# Altium PCB XPIRL_0V0.PCBDOC (part 4 of 4)
Units mil, origin at the board's own origin, x right, y up, seen from the top; angles counter-clockwise.
Board outline 3497.26 x 1372.5 mil, 6 copper layers (Top Layer, Mid-Layer 1, Mid-Layer 2, Mid-Layer 3, Mid-Layer 4, Bottom Layer); 217 components, 126 nets, 782 pads, 361 vias.
Unrouted connection lines stored in the file: 96.
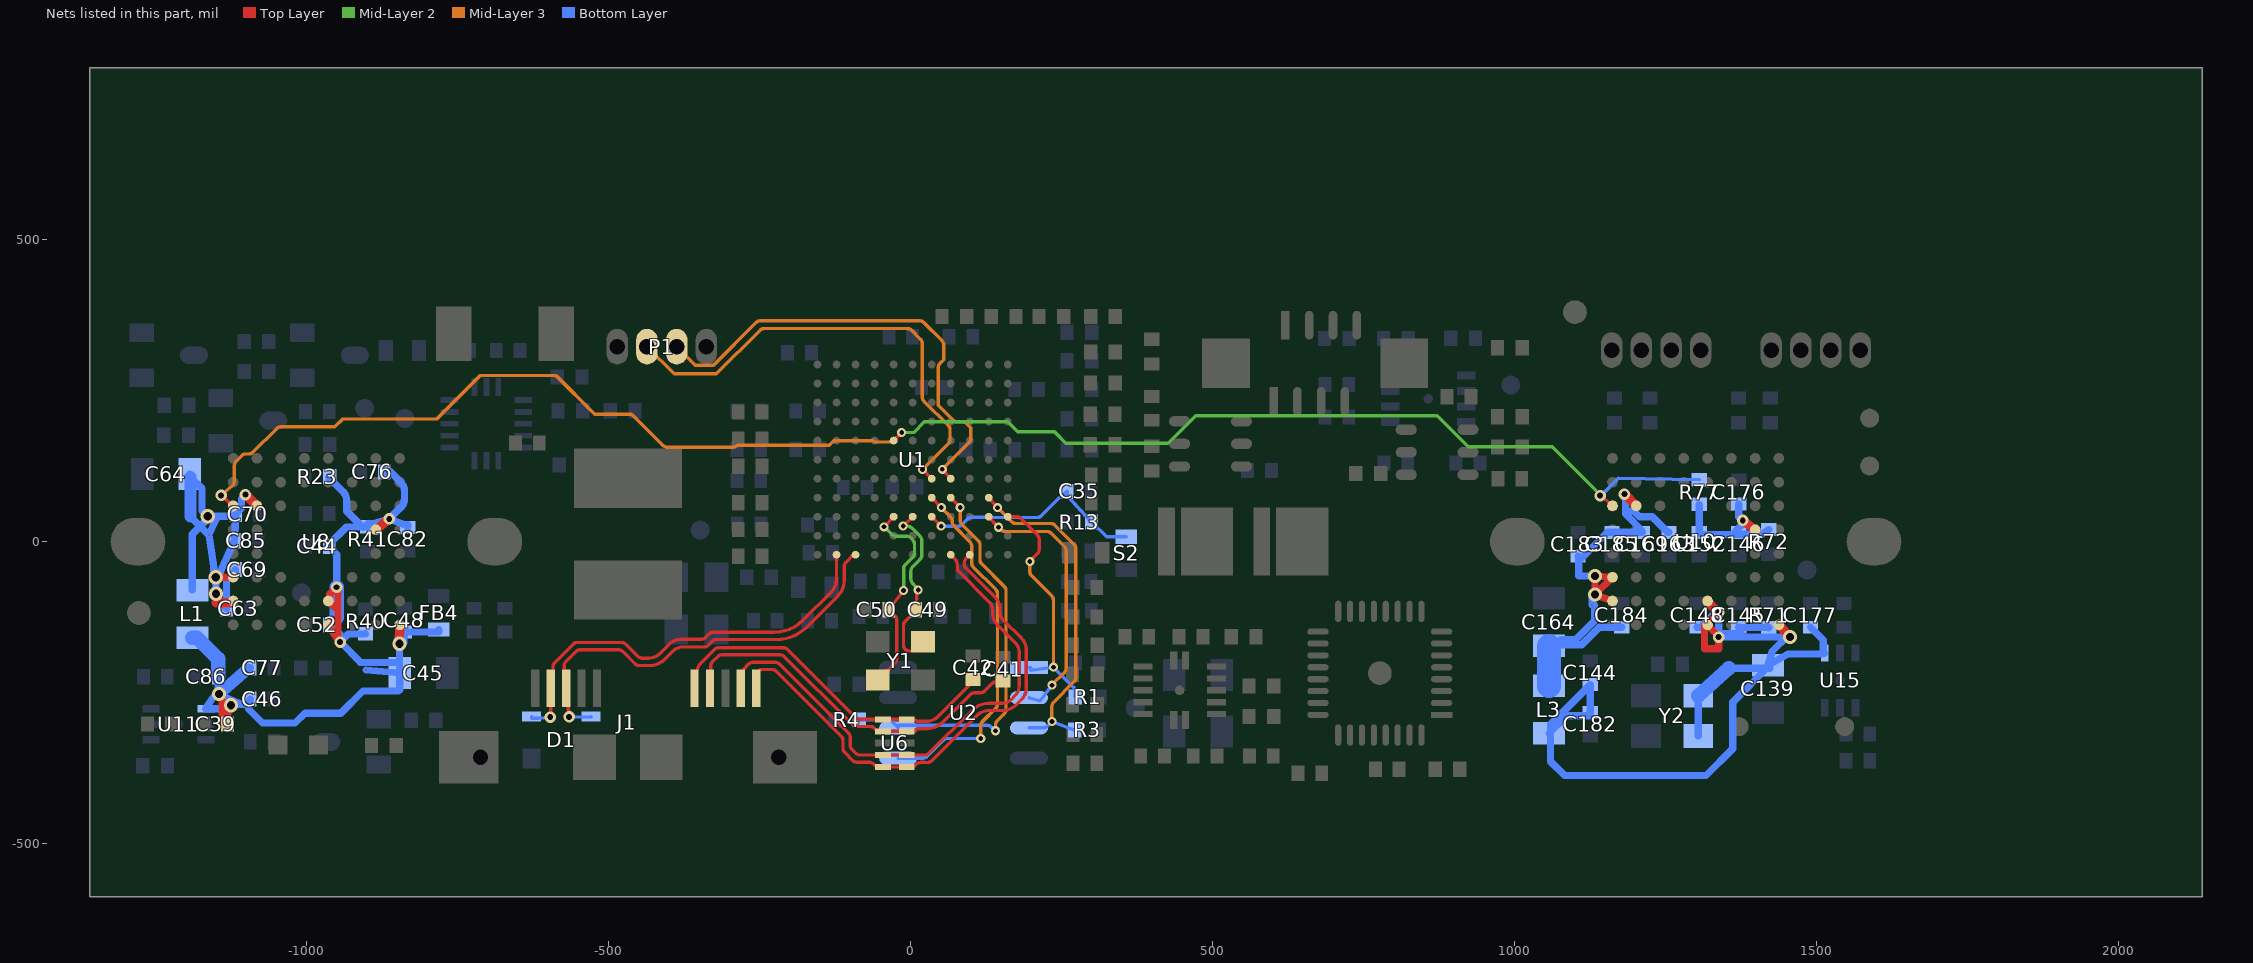
[diagram p8: the nets of this part, all layers, seen from the top]

## Via types
v1: diameter 19, hole 9.84, Top Layer to Bottom Layer, 139 vias
v2: diameter 15, hole 7.87, Top Layer to Bottom Layer, 113 vias
v3: diameter 20.47, hole 11.81, Top Layer to Bottom Layer, 58 vias
v4: diameter 23.62, hole 13.78, Top Layer to Bottom Layer, 42 vias
v5: diameter 0, hole 0, Top Layer to Bottom Layer, 9 vias

## Nets (pads, with @x,y where several pads share a name; then routed paths per layer and width w, separated by ;. In a path a pad name is that pad's centre, name@x,y a point inside that pad or via, vN(x,y) a via of type N, cw(c..) or ccw(c..) an arc to the next point about the centre after c; other vN are vias at no path point) (continued)
ROM_WPN: R3.2 U1.D2 U2.3 | length 603.8
  Top Layer w5.6: U1.D2@128.86,72.7 v2(143.47,56.19)
  Mid-Layer 3 w5.6: v2(143.47,56.19) 166.83,32.83 ; v2(233.41,-298.02) 233.41,-272.91 ; 166.83,32.83 ccw(c173.76,39.76) 173.76,29.96 ; 166.83,32.83 ccw(c173.76,39.76) 173.76,29.96 ; 173.76,29.96 231.57,29.96 ; 231.57,29.96 cw(c231.57,20.16) 238.5,27.09 ; 231.57,29.96 cw(c231.57,20.16) 238.5,27.09 ; 233.41,-272.91 cw(c243.21,-272.91) 236.28,-265.98 ; 233.41,-272.91 cw(c243.21,-272.91) 236.28,-265.98 ; 236.28,-265.98 269.95,-232.3 ; 238.5,27.09 269.95,-4.37 ; 269.95,-232.3 ccw(c263.02,-225.38) 272.82,-225.38 ; 269.95,-232.3 ccw(c263.02,-225.38) 272.82,-225.38 ; 269.95,-4.37 cw(c263.02,-11.3) 272.82,-11.3 ; 269.95,-4.37 cw(c263.02,-11.3) 272.82,-11.3 ; 272.82,-225.38 272.82,-11.3
  Bottom Layer w5.6: U2.3@195.41,-308.46 218.9,-308.46 ccw(c218.9,-298.66) 225.83,-305.59 v2(233.41,-298.02) 270.84,-312.23 R3.2@271.32,-311.75
RSTN: C35.2 R13.2 S2.1 U1.C5 | length 387.2
  Top Layer w5.6: U1.C5@34.37,41.2 v2(50.12,25.45)
  Bottom Layer w5.6: v2(50.12,25.45) 77.81,25.45 ccw(c77.81,35.25) 84.74,28.32 93.9,37.49 cw(c100.83,30.56) 100.83,40.36 127.63,40.36 128.04,39.95 209.19,39.95 ccw(c209.19,49.75) 216.12,42.82 247.19,73.89 247.26,73.89 C35.2@258.75,83.11 259.11,75.71 R13.2@298.9,32.32 299.53,32.32 323.88,7.97 S2.1@356.5,7.97
SPI_MISO: U1.C2 U2.2 | length 437.2
  Top Layer w5.6: U1.C2@128.86,41.2 144.27,23.62 v2(144.99,23.71)
  Mid-Layer 3 w5.6: v2(144.99,23.71) 149.07,19.63 ccw(c156,26.56) 156,16.76 225.16,16.76 cw(c225.16,6.96) 232.09,13.89 254.45,-8.47 cw(c247.52,-15.4) 257.32,-15.4 257.32,-209.02 cw(c247.52,-209.02) 254.45,-215.95 233.41,-236.99 v2(233.41,-237.72)
  Bottom Layer w5.6: U2.2@195.41,-258.46 213.45,-263.78 214.93,-262.3 ccw(c207.99,-255.37) 215.01,-262.22 v2(233.41,-237.72)
SPI_MOSI: U1.D5 U2.5 | length 601.5
  Top Layer w5.6: U1.D5@34.37,72.7 v2(50.38,56.26)
  Mid-Layer 3 w5.6: v2(50.38,56.26) 65.55,41.09 cw(c58.62,34.16) 68.42,34.16 68.42,32.9 ccw(c78.22,32.9) 71.29,25.97 97.67,-0.41 cw(c90.74,-7.34) 100.54,-7.34 100.54,-35.3 ccw(c110.34,-35.3) 103.41,-42.23 140.42,-79.24 cw(c133.49,-86.17) 143.29,-86.17 143.29,-268.99 cw(c133.49,-268.99) 140.42,-275.91 118.48,-297.86 ccw(c125.4,-304.79) 115.6,-304.79 v2(115.6,-325.96)
  Bottom Layer w5.6: U2.5@-21.13,-358.46 20.19,-358.46 ccw(c20.19,-348.66) 27.12,-355.59 53.89,-328.83 cw(c60.82,-335.76) 60.82,-325.96 v2(115.6,-325.96)
SPI_SCK: R4.2 U1.D4 U2.6 | length 667.2
  Top Layer w5.6: U1.D4@65.87,72.7 81.62,56.7 v2(81.58,56.43)
  Mid-Layer 3 w5.6: v2(81.58,56.43) 81.58,35.43 ccw(c91.38,35.43) 84.45,28.5 111.41,1.54 cw(c104.48,-5.39) 114.28,-5.39 114.28,-29.95 ccw(c124.08,-29.95) 117.15,-36.88 154.6,-74.32 cw(c147.67,-81.25) 157.47,-81.25 157.47,-277.95 cw(c147.67,-277.95) 154.6,-284.88 142.9,-296.58 ccw(c149.83,-303.51) 140.03,-303.51 v2(140.03,-313.12)
  Bottom Layer w5.6: R4.2@-85.39,-295.26 -34.33,-295.26 U2.6@-21.13,-308.46 -21.13,-303.91 125.62,-303.91 cw(c125.62,-313.71) 132.55,-306.78 138.89,-313.12 v2(140.03,-313.12)
SPI_SSN: R1.2 U1.C1 U2.1 | length 449.9
  Top Layer w5.6: U1.C1@160.36,41.2 175.14,41.2 ; v2(196.79,-32.97) 209.27,-20.49 ; 175.14,41.2 cw(c175.14,31.4) 182.07,38.33 ; 175.14,41.2 cw(c175.14,31.4) 182.07,38.33 ; 182.07,38.33 209.27,11.13 ; 209.27,-20.49 ccw(c202.34,-13.56) 212.14,-13.56 ; 209.27,-20.49 ccw(c202.34,-13.56) 212.14,-13.56 ; 209.27,11.13 cw(c202.34,4.2) 212.14,4.2 ; 209.27,11.13 cw(c202.34,4.2) 212.14,4.2 ; 212.14,-13.56 212.14,4.2
  Mid-Layer 3 w5.6: v2(196.79,-32.97) 196.79,-49.63 ; v2(236.01,-207.86) 236.01,-96.97 ; 196.79,-49.63 ccw(c206.59,-49.63) 199.66,-56.56 ; 196.79,-49.63 ccw(c206.59,-49.63) 199.66,-56.56 ; 199.66,-56.56 233.14,-90.04 ; 233.14,-90.04 cw(c226.22,-96.97) 236.01,-96.97 ; 233.14,-90.04 cw(c226.22,-96.97) 236.01,-96.97
  Bottom Layer w5.6: U2.1@195.41,-208.46 198.35,-208.46 198.35,-213.13 v2(236.01,-207.86) 269.04,-240.88 cw(c262.11,-247.81) 271.91,-247.81 R1.2@271.91,-257.13
SS_DM: D1.2 J1.2 U1.A10 | length 713.3
  Top Layer w5.5: J1.2@-596.46,-242.95 -592.4,-242.95 -592.4,-207.08 cw(c-582.78,-207.08) -589.58,-200.28 -559.12,-169.81 cw(c-552.31,-176.62) -552.31,-166.99 -479.26,-166.99 cw(c-479.26,-176.62) -472.45,-169.81 -452.06,-190.21 ccw(c-445.25,-183.4) -445.25,-193.03 -434.91,-193.03 ccw(c-434.91,-164.85) -414.98,-184.77 -400.18,-169.97 cw(c-380.37,-189.77) -380.37,-161.77 -347.05,-161.77 ccw(c-347.05,-151.97) -340.12,-158.9 -334.12,-152.9 cw(c-327.19,-159.83) -327.19,-150.03 -225.98,-150.03 ccw(c-225.98,-83.55) -178.97,-130.56 -132.19,-83.78 ccw(c-154.12,-61.85) -123.11,-61.85 U1.A10@-123.11,-21.79
  Top Layer w5.6: v1(-597.14,-290.56) -596.46,-290.56 J1.2@-596.46,-242.95
  Bottom Layer w5.6: D1.2@-627.93,-289.87 -627.93,-292.23 -617.14,-292.23 v1(-597.14,-290.56)
SS_DP: D1.3 J1.3 U1.A9 | length 722.6
  Top Layer w5.5: J1.3@-570.87,-242.95 -573.82,-242.95 -573.82,-215.9 ccw(c-583.44,-215.9) -573.82,-215.66 -574.07,-205.96 cw(c-564.44,-205.72) -574.07,-205.72 cw(c-564.44,-205.72) -571.25,-198.91 -554.15,-181.81 cw(c-547.34,-188.62) -547.34,-178.99 -484.23,-178.99 cw(c-484.23,-188.62) -477.42,-181.81 -456.79,-202.44 ccw(c-449.99,-195.64) -449.99,-205.26 -431.52,-205.26 ccw(c-432.51,-170.21) -407.72,-195 -393.97,-181.26 cw(c-377.34,-197.89) -377.34,-174.37 -342.54,-174.37 ccw(c-342.54,-164.57) -335.61,-171.5 -329.17,-165.05 cw(c-322.24,-171.98) -322.24,-162.18 -222.47,-162.18 ccw(c-222.47,-91.79) -172.69,-141.56 -121.46,-90.33 ccw(c-148.55,-63.24) -110.24,-63.24 -110.24,-40.92 cw(c-100.44,-40.92) -107.37,-33.99 -95.17,-21.79 U1.A9@-91.61,-21.79
  Top Layer w5.6: J1.3@-570.87,-242.95 J1.3@-570.87,-244.4 ; v1(-565.69,-290.35) J1.3@-570.8,-245.51 ; J1.3@-570.87,-244.4 ccw(c-561.07,-244.4) J1.3@-570.8,-245.51 ; J1.3@-570.87,-244.4 ccw(c-561.07,-244.4) J1.3@-570.8,-245.51
  Bottom Layer w5.6: v1(-565.69,-290.35) D1.3@-529.5,-289.87
SS_RX_M: J1.9 U1.A4 U6.4 U6.7 | length 922.8
  Top Layer w5.5: J1.9@-281.5,-242.95 J1.9@-281.5,-219.82 ; U1.A4@65.87,-21.79 73.64,-29.56 cw(c66.84,-36.37) 76.46,-36.37 76.46,-46.86 130.04,-100.43 cw(c117.03,-113.44) 135.42,-113.44 135.42,-119.28 ccw(c161.51,-119.28) 143.06,-137.73 172.53,-167.19 cw(c156.65,-183.07) 179.11,-183.07 179.11,-239.07 cw(c156.98,-239.07) 172.62,-254.71 165.86,-261.48 cw(c151.04,-246.65) 151.04,-267.62 129.74,-267.62 ccw(c129.74,-309.24) 100.31,-279.81 29.51,-350.6 cw(c22.71,-343.8) 22.71,-353.42 U6.7@-6.98,-353.42 U6.4@-46.35,-353.42 -84.28,-353.42 ; J1.9@-281.5,-219.82 cw(c-271.87,-219.82) J1.9@-278.68,-213.02 ; J1.9@-281.5,-219.82 cw(c-271.87,-219.82) J1.9@-278.68,-213.02 ; J1.9@-278.68,-213.02 -268.29,-202.63 ; -268.29,-202.63 cw(c-261.48,-209.43) -261.48,-199.81 ; -268.29,-202.63 cw(c-261.48,-209.43) -261.48,-199.81 ; -261.48,-199.81 -224.74,-199.81 ; -224.74,-199.81 cw(c-224.74,-209.43) -217.93,-202.63 ; -224.74,-199.81 cw(c-224.74,-209.43) -217.93,-202.63 ; -217.93,-202.63 -103.32,-317.24 ; -103.32,-317.24 cw(c-110.12,-324.05) -100.5,-324.05 ; -103.32,-317.24 cw(c-110.12,-324.05) -100.5,-324.05 ; -100.5,-337.2 ccw(c-90.88,-337.2) -97.68,-344.01 ; -100.5,-337.2 ccw(c-90.88,-337.2) -97.68,-344.01 ; -100.5,-337.2 -100.5,-324.05 ; -97.68,-344.01 -91.08,-350.6 ; -91.08,-350.6 ccw(c-84.28,-343.8) -84.28,-353.42 ; -91.08,-350.6 ccw(c-84.28,-343.8) -84.28,-353.42
SS_RX_P: J1.10 U1.A3 U6.5 U6.6 | length 922.9
  Top Layer w5.5: J1.10@-255.91,-242.95 J1.10@-255.91,-221.43 ; U6.5@-57.01,-373.11 -61.88,-368.24 ; 22.18,-365.63 27.47,-365.63 ccw(c27.47,-356) 34.28,-362.81 108.66,-288.43 cw(c129.66,-309.43) 129.66,-279.73 150.94,-279.73 ccw(c150.94,-246.37) 174.54,-269.96 183.64,-260.85 ccw(c165.63,-242.83) 191.11,-242.83 191.11,-180.49 ccw(c161.08,-180.49) 182.31,-159.26 153.01,-129.96 cw(c166.51,-116.46) 147.42,-116.46 147.42,-109.79 ccw(c125.04,-109.79) 140.87,-93.97 91.28,-44.38 cw(c98.09,-37.57) 88.46,-37.57 88.46,-34.68 cw(c98.09,-34.68) 91.28,-27.88 U1.A3@97.37,-21.79 ; J1.10@-255.91,-221.43 cw(c-246.28,-221.43) -246.28,-211.81 ; J1.10@-255.91,-221.43 cw(c-246.28,-221.43) -246.28,-211.81 ; -246.28,-211.81 -229.71,-211.81 ; -229.71,-211.81 cw(c-229.71,-221.43) -222.9,-214.63 ; -229.71,-211.81 cw(c-229.71,-221.43) -222.9,-214.63 ; -222.9,-214.63 -115.32,-322.21 ; -115.32,-322.21 cw(c-122.12,-329.02) -112.5,-329.02 ; -115.32,-322.21 cw(c-122.12,-329.02) -112.5,-329.02 ; -112.5,-342.17 ccw(c-102.87,-342.17) -109.68,-348.98 ; -112.5,-342.17 ccw(c-102.87,-342.17) -109.68,-348.98 ; -112.5,-342.17 -112.5,-329.02 ; -109.68,-348.98 -96.05,-362.6 ; -96.05,-362.6 ccw(c-89.25,-355.8) -89.25,-365.42 ; -96.05,-362.6 ccw(c-89.25,-355.8) -89.25,-365.42 ; -89.25,-365.42 -68.68,-365.42 ; -68.68,-365.42 cw(c-68.68,-375.05) -61.88,-368.24 ; -68.68,-365.42 cw(c-68.68,-375.05) -61.88,-368.24
  Top Layer w5.6: U6.5@-57.01,-373.11 U6.5@-46.35,-373.11 U6.6@-6.98,-373.11 4.3,-373.11 8.9,-368.5 cw(c15.83,-375.43) 15.83,-365.63 22.18,-365.63
SS_TX_M: C42.2 J1.6 U6.1 U6.10 | length 584.5
  Top Layer w5.5: J1.6@-358.27,-242.95 -358.27,-224.56 cw(c-348.64,-224.56) -357.47,-220.72 -350.6,-204.96 cw(c-341.77,-208.8) -348.58,-202 -324.96,-178.37 cw(c-318.15,-185.18) -318.15,-175.55 -211.36,-175.55 cw(c-211.36,-185.18) -204.55,-178.37 -91.54,-291.38 ccw(c-84.74,-284.57) -84.74,-294.2 -58.23,-294.2 -58.06,-294.37 U6.1@-46.35,-294.37 U6.10@-6.98,-294.37 5.71,-294.37 6.15,-294.8 ccw(c13.07,-287.87) 13.07,-297.67 25.14,-297.67 ccw(c25.14,-269.2) 45.27,-289.33 98.03,-236.58 ccw(c91.1,-229.65) 100.9,-229.65 100.9,-228.53 C42.2@102.87,-228.53
SS_TX_P: C41.2 J1.7 U6.2 U6.9 | length 614.1
  Top Layer w5.5: J1.7@-332.68,-242.95 -331.45,-242.95 -331.45,-205.82 cw(c-321.82,-205.82) -328.63,-199.02 -319.99,-190.37 cw(c-313.18,-197.18) -313.18,-187.55 -216.33,-187.55 cw(c-216.33,-197.18) -209.52,-190.37 -96.51,-303.38 ccw(c-89.71,-296.57) -89.71,-306.2 -67.19,-306.2 cw(c-67.19,-315.82) -60.38,-309.02 -58.16,-311.23 ccw(c-51.36,-304.43) -51.36,-314.05 U6.2@-46.35,-314.05 U6.9@-6.98,-314.05 5.36,-314.05 6.87,-312.54 cw(c13.68,-319.35) 13.68,-309.72 26.5,-309.72 ccw(c26.5,-271.93) 53.22,-298.65 98.99,-252.88 cw(c105.8,-259.68) 105.8,-250.06 ; 105.8,-250.06 115.6,-250.06 ccw(c115.6,-240.43) 122.41,-247.24 134.81,-234.84 cw(c141.61,-241.65) 141.61,-232.02 152.57,-232.02 C41.2@152.57,-230.79
STANDBY: R77.1 U1.G7 U8.F8 U10.F8 | length 2789.9
  Top Layer w5.5: v1(1141.12,76.14) 1140.78,77.86 U10.F8@1161.42,59.06
  Top Layer w5.6: U1.G7@-28.62,167.19 v2(-15.24,180.56)
  Top Layer w6: v1(-1142.16,76.63) U8.F8@-1122.05,59.06
  Mid-Layer 2 w5.6: v2(-15.24,180.56) 4.42,180.56 22.15,198.3 64.46,198.3 64.62,198.14 150.92,198.14 ; 150.93,198.15 160.54,198.14 176.66,182.02 237.71,182.02 256.64,163.08 425.69,163.08 471.22,208.62 871.04,208.62 922.9,156.76 1061.85,156.76 1140.42,78.18 v1(1141.12,76.14)
  Mid-Layer 3 w5.6: v1(-1142.16,76.63) -1122.88,93.28 ccw(c-1129.81,100.21) -1120.01,100.21 -1120.01,126.33 cw(c-1110.21,126.33) -1117.14,133.26 -1108.21,142.18 cw(c-1101.28,135.25) -1101.28,145.05 -1096.2,145.05 ccw(c-1096.2,154.85) -1089.27,147.92 -1050.26,186.93 cw(c-1043.33,180) -1043.33,189.8 -953.49,189.8 -940.33,202.97 -785.02,202.97 -713.03,274.96 -587.55,274.96 -523.6,211.01 -466.5,211.01 cw(c-466.5,201.21) -459.57,208.14 -410.62,159.19 ; -410.62,159.19 ccw(c-403.69,166.12) -403.69,156.32 -294.49,156.32 ccw(c-294.49,166.12) -287.56,159.19 ; -287.56,159.19 -287.06,159.7 -135.14,159.7 -127.62,167.22 -92.89,167.22 -92.66,167 -61.38,167 -59.32,164.94 -30.86,164.94 v2(-15.24,180.56)
  Bottom Layer w5.6: v1(1141.12,76.14) 1142.44,76.14 1171.31,105.02 R77.1@1305.01,102.51
UART_RX: P1.2 U1.E4 | length 783.3
  Top Layer w5.6: v2(51.98,119.64) U1.E4@65.87,104.19
  Mid-Layer 3 w5.6: P1.2@-387.8,322.73 -357.08,292.02 -326.84,292.02 -255.97,362.89 cw(c-249.04,355.96) -249.04,365.76 13.92,365.76 cw(c13.92,355.96) 20.85,362.89 51.6,332.14 cw(c44.67,325.21) 54.47,325.21 54.47,301.3 48.14,294.96 ccw(c55.07,288.03) 45.27,288.03 45.27,225.8 70.06,201.01 ccw(c76.99,207.94) 76.99,198.14 85.38,198.14 cw(c85.38,188.34) 92.31,195.27 98.95,188.62 98.95,170.67 cw(c89.15,170.67) 96.08,163.74 v2(51.98,119.64)
UART_TX: P1.3 U1.E5 | length 783.5
  Top Layer w5.6: v2(19.37,119.56) U1.E5@34.37,104.19
  Mid-Layer 3 w5.6: P1.3@-437.01,322.73 -392.03,277.76 -321.93,277.76 -249.78,349.91 cw(c-242.85,342.98) -242.85,352.78 -5.76,352.78 cw(c-5.76,342.98) 1.17,349.91 15.76,335.31 cw(c8.84,328.38) 18.64,328.38 18.64,239.62 ccw(c28.44,239.62) 21.51,232.7 61.9,192.3 cw(c54.97,185.37) 64.77,185.37 64.77,169.01 cw(c54.97,169.01) 61.9,162.08 v2(19.37,119.56)
VAA3.3V: C63.2 C64.2 C69.2 C70.2 C85.2 L1.2 U8.B8 U8.C8 U8.F7 | length 1050.2
  Top Layer w12: v4(-1150.5,-86.5) -1149.79,-101.06 ; v4@-1144.99,-57.19 -1143.12,-59.06 U8.C8@-1122.05,-59.06
  Top Layer w15.75: -1149.79,-101.06 -1120.9,-101.06 U8.B8@-1122.05,-98.43 ; v1(-1101.8,77.73) U8.F7@-1082.68,59.06
  Bottom Layer w12: C64.2@-1194,111.65 -1193.59,111.24 -1193.59,42.2 v5(-1162.32,10.93) ; C64.2@-1193.59,107.79 -1192.63,106.83 -1173.44,87.64 -1173.44,51.12 v4(-1164.29,41.97) ; -1192.63,41.24 v5(-1162.32,10.93) ; L1.2@-1189.64,-80.27 -1189.64,12.09 -1160.84,40.9 v4(-1164.29,41.97) ; C69.2@-1118.46,-46.39 -1118.46,-50 -1133.16,-64.7 C63.2@-1133.16,-111.49 -1151.48,-93.17 -1150.5,-92.19 v4(-1150.5,-86.5) v4(-1151.05,-59.1) ; C70.2@-1117.94,41.97 v4(-1164.29,41.97) ; v1(-1101.8,77.73) -1101.8,77.25 -1108.17,70.88 -1108.17,54.9 C70.2@-1117.76,45.32 -1117.91,45.16 -1117.91,42 C85.2@-1119.86,1.21 -1147.68,-59.46 v4@-1151.2,-59.46 ; v4(-1164.29,41.97) -1150.8,35.71 v5(-1162.32,10.93) ; v5(-1162.32,10.93) v4(-1151.05,-59.1) ; v5(-1162.32,10.93) -1154.53,-39.74 -1154.53,-46.26 v4@-1151.2,-59.46 ; v4@-1151.2,-59.46 v4(-1151.05,-59.1)
  Bottom Layer w19.68: -1192.63,41.24 C64.2@-1192.63,106.83
VAAR3.3V: C163.2 C164.2 C169.2 C183.2 C184.2 C185.2 L3.2 U10.B8 U10.C8 U10.F7 | length 857
  Top Layer w12: U10.B8@1161.42,-98.43 v4(1132.47,-87.66) ; v4(1132.47,-87.66) U10.C8@1161.42,-59.06 v4(1132.47,-56.85) v4(1132.47,-87.66)
  Top Layer w15.75: v1(1181.13,78.58) U10.F7@1200.79,59.06
  Bottom Layer w5.6: C185.2@1152.41,14.66 1159.94,14.66 C185.2@1160.58,15.26
  Bottom Layer w12: C164.2@1056.31,-172.71 C164.2@1062.64,-170.59 ; C183.2@1108.97,-28.74 C183.2@1104.34,-24.11 1105.72,-25.5 1105.72,-56.85 v4(1132.47,-56.85) ; C183.2@1109.01,-28.74 1152.41,14.66 1153.06,15.31 C185.2@1160.58,15.26 C169.2@1210.62,15.26 1209.67,19.13 1182.83,45.97 ; v4(1132.47,-87.66) 1127.41,-91.59 v5(1127.41,-104.84) 1131.72,-104.84 1131.72,-130.92 1100.73,-161.91 1075.51,-161.91 1064.71,-172.71 C164.2@1062.64,-170.59 ; C184.2@1176.98,-141.81 1139.54,-141.81 1110.76,-170.59 C164.2@1062.64,-170.59 ; v1(1181.13,78.58) 1182.83,75.14 1182.83,45.97 ; C163.2@1255.02,15.26 1253.05,15.31 1227.39,40.97 1206.28,40.97 1196.55,50.7 1182.83,50.7 1182.83,45.97
  Bottom Layer w39.37: L3.2@1056.31,-238.88 C164.2@1056.31,-172.71
VDD3.3V: C39.2 C44.2 C45.2 C46.2 C48.2 C52.2 C76.1 C77.2 C82.2 C86.2 FB4.1 L1.1 R23.2 R40.2 R41.2 U8.A1 U8.A4 U8.B4 U8.E2 U11.1 | length 1983.8
  Top Layer w12: v4(-1145.5,-252.46) -1140.6,-257.36 -1140.6,-301.85 C39.2@-1131.19,-302.13 -1131.1,-272.05 -1130.12,-271.07 v4(-1125.63,-271.07) ; -962.07,-87.24 -950.74,-75.92 v1(-950.74,-75.55) -950.74,-75.64 -950.49,-75.9 -948.59,-78.47 -948.59,-114.25 ; -962.03,-87.27 U8.B4@-964.57,-98.43 -955.88,-106.79 -955.88,-106.96 -948.59,-114.25 ; v1(-944.92,-166.31) v1@-948.59,-162.92 ; v1@-948.59,-162.92 U8.A4@-964.57,-137.8 -948.59,-126.13 -948.59,-114.25 ; v1@-948.59,-162.92 -948.59,-115.58 -948.59,-114.25
  Top Layer w15.75: U8.E2@-885.83,19.69 v1(-863.61,37.59) ; v4(-846.73,-169.24) U8.A1@-846.46,-137.8
  Bottom Layer w12: C86.2@-1146.6,-223.77 -1146.6,-250.1 v4(-1125.63,-271.07) ; C77.2@-1098.79,-211.62 C77.2@-1093.86,-209.05 ; R23.2@-962.18,107.66 -963.65,106.09 -940.28,82.72 cw(c-955.13,67.87) -934.13,67.87 -934.13,50.29 -907.66,23.82 R41.2@-899.16,24.33 ; C52.2@-952.77,-127.72 C52.2@-962.96,-137.92 -961.43,-137.92 -944.92,-154.43 v1(-944.92,-166.31) ; v1(-950.74,-75.55) -950.74,-21.28 C44.2@-962.96,-7.59 -964.43,-5.62 -934.99,23.82 R41.2@-899.16,24.33 ; R40.2@-902.82,-152.62 -903.39,-153.18 -931.78,-153.18 v1(-944.92,-166.31) ; v5(-902,-212.41) C45.2@-846.37,-217.72 ; C76.1@-871.89,115.42 -861.71,115.42 -844.51,98.22 cw(c-859.36,83.37) -838.36,83.37 -838.36,71.53 cw(c-859.36,71.53) -844.51,56.68 v1(-863.61,37.59) ; C82.2@-833,23.55 -833,28.18 -839.6,28.18 v1(-863.61,37.59) ; FB4.1@-781.89,-145.35 -781.89,-149.65 C48.2@-838.86,-149.65 -839.7,-167.51 v4(-846.73,-169.24) C45.2@-846.5,-200.1 ; v4(-1125.63,-271.07) -1125.63,-269.32 -1098.79,-269.32 C46.2@-1093.86,-260.61 -1096.64,-277.34 -1073.46,-300.52 -1019.58,-300.52 -1003.22,-284.16 -943.73,-284.16 -906.99,-247.41 -848.38,-247.41 -846.37,-245.4 C45.2@-846.37,-217.72 ; v4(-1125.63,-271.07) -1127.66,-267.53 -1112.8,-267.53 -1112.73,-267.6 v4(-1145.5,-252.46) -1149.66,-252.46 -1155.51,-258.3 U11.1@-1167.32,-276.6 -1125.63,-276.6 v4(-1125.63,-271.07) ; v1(-944.92,-166.31) -944.48,-166.31 -911.99,-198.8 -911.99,-200.1 C45.2@-846.5,-200.1 ; R41.2@-899.16,24.33 -899.16,29.36 -892.56,29.36 v1(-863.61,37.59) ; C45.2@-846.5,-200.1 -846.5,-214.73 -846.44,-214.79 -846.44,-217.65 C45.2@-846.37,-217.72
  Bottom Layer w19.68: v4(-1145.5,-252.46) C77.2@-1098.79,-211.62
  Bottom Layer w23.62: L1.1@-1189.64,-159.01 -1181.77,-159.01 -1146.6,-194.18 C86.2@-1146.6,-223.77 ; C52.2@-952.77,-127.72 -950.74,-125.7 v1(-950.74,-75.55)
VDDR3.3V: C139.2 C144.2 C145.2 C146.2 C148.2 C152.2 C176.1 C177.2 C182.2 L3.1 R71.2 R72.2 R77.2 U10.A1 U10.A4 U10.B4 U10.E2 U15.1 Y2.1 Y2.4 | length 2019.6
  Top Layer w12: U10.A4@1318.9,-137.8 v1(1337.27,-158.04) 1337.27,-177.49 1313.65,-177.49 1313.65,-138.57 v1@1335.41,-116.81
  Top Layer w15.75: U10.B4@1318.9,-98.43 1335.41,-116.81 v1(1337.68,-117.26) ; v1(1377.1,35.06) U10.E2@1397.64,19.69 ; U10.A1@1437.01,-137.8 v4(1455.38,-158.04)
  Bottom Layer w5.5: 1371.9,-158.04 C145.2@1372.21,-141.59
  Bottom Layer w12: Y2.1@1303.4,-322.04 Y2.4@1303.4,-255.11 ; R77.2@1305.01,61.57 C152.2@1305.01,15.26 1308.67,11.93 1360.8,11.97 C146.2@1361.22,12.28 ; v1(1337.27,-158.04) 1371.9,-158.04 v4(1455.38,-158.04) 1452.49,-155.14 1425.51,-182.12 C139.2@1418.8,-204.55 ; v1(1337.68,-117.26) v1@1337.27,-118.67 ; 1354.07,-209.54 1422.23,-209.54 C139.2@1418.8,-204.55 ; C145.2@1370.55,-141.81 C145.2@1372.21,-141.59 ; C176.1@1370.55,62.36 1370.55,40.66 v1(1377.1,35.06) 1379.66,32.07 1365.07,17.49 C146.2@1370.55,15.26 1362.35,12.28 C146.2@1361.22,12.28 ; R71.2@1420,-142.6 1373,-142.38 C145.2@1372.21,-141.59 ; R72.2@1420,19.87 1409.54,12.28 C146.2@1361.22,12.28 ; C177.2@1489.27,-141.81 1510.35,-162.89 U15.1@1510.35,-184.99 ; U15.1@1512.62,-184.45 1512.08,-184.99 U15.1@1510.35,-184.99 ; L3.1@1056.31,-317.62 1058.65,-319.96 1058.65,-363.48 1082.58,-387.41 1316.12,-387.41 1360.61,-342.92 1360.61,-265.78 1418.8,-207.59 C139.2@1418.8,-204.55 ; L3.1@1056.31,-317.62 1085.63,-288.3 1123.18,-288.3 C182.2@1124.77,-282.72 C144.2@1124.77,-236.83 1059.18,-302.42 1059.18,-314.75 L3.1@1056.31,-317.62 ; v1@1337.27,-118.67 1337.27,-152.26 1374.42,-152.26 C145.2@1372.21,-141.59 ; v1@1337.27,-118.67 1333.84,-118.67 1310.7,-141.81 C148.2@1301.53,-141.81 1307.21,-141.81 1330.36,-118.67 v1@1337.27,-118.67 ; C139.2@1418.8,-204.55 1452.23,-186.1 1509.24,-186.1 U15.1@1510.35,-184.99
  Bottom Layer w23.62: Y2.4@1303.4,-255.11 1354.07,-209.54
  other v5: 1340.38,-198.32
XTI: C49.2 U1.C6 Y1.1 | length 314.5
  Top Layer w5.5: v2(12.05,-80.25) 9.64,-80.25 9.64,-112.8 C49.2@7.99,-112.8 7.99,-115.07 -9.23,-131.51 ccw(c-2.58,-138.47) -12.2,-138.47 -12.2,-171.53 ccw(c-2.58,-171.53) -2.58,-181.16 20.88,-181.16 Y1.1@20.01,-166.07
  Top Layer w5.6: v2(-12.81,25.95) U1.C6@2.88,41.2
  Mid-Layer 2 w5.5: v2(-12.81,25.95) -12.81,25.45 -5.61,25.45 cw(c-5.61,15.83) 1.19,22.64 15.06,8.77 cw(c8.25,1.96) 17.88,1.96 17.88,-22.61 cw(c8.25,-22.61) 15.06,-29.42 2.7,-41.78 ccw(c9.5,-48.59) -0.12,-48.59 -0.12,-62.06 ccw(c9.5,-62.06) 2.7,-68.87 v2(12.05,-80.25)
XTO: C50.1 U1.C7 Y1.3 | length 348.3
  Top Layer w5.5: Y1.3@-54.79,-229.07 -26.12,-200.4 ccw(c-32.93,-193.59) -23.3,-193.59 -23.3,-130.42 ccw(c-33.1,-130.42) -26.17,-123.49 -36.64,-113.02 C50.1@-36.64,-112.8 -29.95,-112.8 -29.95,-104.14 v2(-12.12,-81.05)
  Top Layer w5.6: v2(-44.37,24.48) U1.C7@-28.62,41.2
  Mid-Layer 2 w5.5: v2(-44.37,24.48) -31.66,11.77 ccw(c-24.85,18.58) -24.85,8.95 -7.11,8.95 cw(c-7.11,-0.67) -0.3,6.13 3.06,2.77 cw(c-3.75,-4.04) 5.88,-4.04 5.88,-18.92 cw(c-3.75,-18.92) 3.06,-25.72 -9.3,-38.08 ccw(c-2.5,-44.89) -12.12,-44.89 v2(-12.12,-81.05)
pads on no net: J1.13 M1.1 M2.1 P1.1 U1.A11 U1.B11 U1.C4 U1.C10 U1.D11 U1.E1 U1.E7 U1.E8 U1.F5 U1.F6 U1.FID1 U1.FID2 U1.G6 U1.H2 U1.H6 U1.J1 U1.K5 U1.L8 U8.A2 U8.A3 U8.A6 U8.B2 U8.B3 U8.B6 U8.D7 U8.D8 U8.E7 U8.E8 U8.G3 U8.G5 U8.H5 U9.7 U10.A2 U10.A3 U10.A6 U10.B2 U10.B3 U10.B6 U10.D7 U10.D8 U10.E7 U10.E8 U10.G3 U10.G5 U10.H5 U11.5 U15.5 U16.12 U16.13 U16.28 U16.29 UB1.1 UB1.2 UB1.3 UB2.1 UB2.2 UB2.3
copper on no net: | length 164.7
  Top Layer w3.94: 161.44,117.01 ccw(c135.24,117.01) 161.44,117.01

## Polygon pours and split planes (outlines as drawn)
VAA3.3V on Bottom Layer "Bottom Layer-VAA3.3V" (solid, remove dead copper, pour order 1000): -1221.72,115.91 -1221.72,-46.5 -1224.89,-46.5 -1224.89,-123.67 -1187.42,-123.79 -1139.22,-123.79 -1097.38,-80.89 -1097.38,115.91
3V3 on Bottom Layer "Bottom Layer-3V3" (solid, remove dead copper, pour order 1001): 903.3,259.31 903.3,94.15 843.45,94.15 843.45,21.82 907.89,21.82 969.98,83.9 969.98,259.31
3V3 on Bottom Layer "Bottom Layer-3V3 1" (solid, remove dead copper, pour order 1002): 300.35,-196.28 300.35,-322.43 449.06,-322.43 449.06,-196.28
1V2_U3TX on Bottom Layer "Bottom Layer-1V2_U3TX" (solid, remove dead copper, pour order 1003): 150.96,-140.58 150.96,-76.82 74.3,-76.82 74.3,14.01 18.4,14.01 18.4,-140.58
3V3 on Bottom Layer "Bottom Layer-3V3 2" (solid, remove dead copper, pour order 1004): 180.63,61.62 282.64,61.62 282.64,-35.41 282.57,-35.41 282.57,-39.65 180.63,-39.65
3V3 on Bottom Layer "Bottom Layer-3V3 3" (solid, remove dead copper, pour order 1005): -806.4,47.13 -806.4,-118.03 -649.68,-118.03 -649.68,-56.54 -731.65,-56.54 -731.65,47.13
5V0 on Bottom Layer "Bottom Layer-5V0" (solid, remove dead copper, pour order 1006): -334.55,122.31 -206.44,122.31 -170.28,86.15 -170.28,55.15 -334.55,55.15
3V3 on Bottom Layer "Bottom Layer-3V3 4" (solid, remove dead copper, pour order 1007): 89.58,79.54 191.06,79.54 191.06,169.54 89.58,169.54
5V0 on Bottom Layer "Bottom Layer-5V0 1" (solid, remove dead copper, pour order 1008): 711.32,168.89 711.32,100.17 794.53,100.17 794.53,168.89
LIMA_CATH1 on Bottom Layer "Bottom Layer-LIMA_CATH1" (solid, remove dead copper, pour order 1009): 187 vertices, not listed, extent 576.08,-121.74 782.49,182.73
5V0 on Bottom Layer "Bottom Layer-5V0 2" (solid, remove dead copper, pour order 1010): 1562.4,-362.73 1477.49,-362.73 1477.49,-274.58 1562.4,-274.58
1V2_AVDD on Bottom Layer "Bottom Layer-1V2_AVDD" (solid, remove dead copper, pour order 1011): -17.86,-137.12 -17.86,-36 -95.23,-36 -147.7,-88.46 -147.7,-137.12
1V2 on Bottom Layer "Bottom Layer-1V2" (solid, remove dead copper, pour order 1012): -56.09,277.73 86.04,277.73 86.04,380.82 -56.09,380.82
LIMA_CATH2 on Bottom Layer "Bottom Layer-LIMA_CATH2" (solid, remove dead copper, pour order 1013): 397.09,135.92 395.44,135.86 393.8,135.69 392.18,135.4 390.58,135 389.01,134.49 387.48,133.88 386,133.15 384.57,132.33 383.2,131.41 381.9,130.39 380.68,129.29 379.53,128.1 378.47,126.84 377.5,125.5 376.63,124.11 375.86,122.65 375.18,121.14 374.62,119.59 374.17,118.01 373.82,116.4 373.59,114.76 373.48,113.12 373.46,112.3 373.46,-99.42 373.52,-101.06 373.69,-102.7 373.98,-104.33 374.38,-105.93 374.89,-107.5 375.51,-109.03 376.23,-110.51 377.05,-111.93 377.98,-113.3 378.99,-114.6 380.09,-115.83 381.28,-116.97 382.54,-118.03 383.88,-119 385.28,-119.87 386.73,-120.65 388.24,-121.32 389.79,-121.88 391.37,-122.34 392.98,-122.68 394.62,-122.91 396.26,-123.02 397.09,-123.04 546.75,-123.04 548.4,-122.98 550.04,-122.81 551.66,-122.52 553.26,-122.12 554.83,-121.61 556.36,-121 557.84,-120.27 559.27,-119.45 560.63,-118.53 561.93,-117.51 563.16,-116.41 564.3,-115.22 565.36,-113.96 566.33,-112.63 567.21,-111.23 567.98,-109.77 568.65,-108.27 569.22,-106.72 569.67,-105.13 570.01,-103.52 570.24,-101.89 570.36,-100.24 570.37,-99.42 570.37,112.3 570.31,113.94 570.14,115.58 569.86,117.21 569.46,118.81 568.95,120.37 568.33,121.9 567.61,123.38 566.78,124.81 565.86,126.18 564.85,127.48 563.74,128.7 562.56,129.85 561.29,130.91 559.96,131.88 558.56,132.75 557.1,133.53 555.6,134.2 554.05,134.76 552.46,135.22 550.85,135.56 549.22,135.79 547.57,135.9 546.75,135.92
AGNDR on Bottom Layer "Bottom Layer-AGNDR" (solid, remove dead copper, pour order 1014): 1264.49,49.22 1077.77,49.22 1018.11,-10.43 1018.11,-135.72 1186.57,-135.72 1264.49,-57.8
VDDR3.3V on Bottom Layer "Bottom Layer-VDDR3.3V" (solid, remove dead copper, pour order 1015): 1290.96,76.11 1290.96,1.19 1437.43,1.19 1437.43,76.11
3V3 on Bottom Layer "Bottom Layer-3V3 5" (solid, remove dead copper, pour order 1016): 571.54,88.08 466.66,88.08 466.66,138.75 571.54,138.75
1V2 on Bottom Layer "Bottom Layer-1V2 1" (solid, remove dead copper, pour order 1017): 91.1,52.06 91.1,-30.06 156.88,-95.85 156.88,-141.48 274.74,-141.48 274.74,-46.43 197.88,-46.43 141.72,9.73 141.72,52.06
VDD3.3V on Bottom Layer "Bottom Layer-VDD3.3V" (solid, remove dead copper, pour order 1018): -882.95,138.68 -882.95,63.46 -973.22,63.46 -973.22,-163.96 -950.07,-187.11 -950.07,-233.4 -966.86,-250.18 -1090.69,-250.18 -1090.69,-144.28 -1214.52,-144.28 -1214.52,-192.31 -1167.65,-192.31 -1167.65,-281.91 -1113.16,-336.4 -935.03,-336.4 -882.37,-283.74 -817.56,-283.74 -817.56,-180.74 -766.64,-180.74 -766.64,-118.82 -911.3,-118.82 -911.3,-4.83 -818.14,-4.83 -818.14,138.68
5V0 on Bottom Layer "Bottom Layer-5V0 3" (solid, remove dead copper, pour order 1019): -1333.57,-192.06 -1333.57,-344.5 -1241.14,-344.5 -1241.14,-192.06
VAAR3.3V on Bottom Layer "Bottom Layer-VAAR3.3V" (solid, remove dead copper, pour order 1020): 1134.37,97.03 1134.37,29.53 1099.28,-5.56 1068.54,-5.56 1068.54,-53.49 1084.87,-53.49 1084.87,-140.98 1018.28,-140.98 1018.28,-255.98 1095.23,-255.98 1095.23,-206.03 1161.37,-139.88 1161.37,-6.24 1272.74,-6.24 1272.74,97.03
1V2 on Bottom Layer "Bottom Layer-1V2 2" (solid, remove dead copper, pour order 1021): 463.77,414.43 463.77,308.65 653.61,308.65 702.34,259.91 702.34,176.13 809.04,176.13 809.04,258.1 763.22,258.1 763.22,414.43
3V3 on Bottom Layer "Bottom Layer-3V3 6" (solid, remove dead copper, pour order 1022): -268.93,-11.87 -170.6,-11.87 -170.6,48.55 -268.93,48.55
5V0 on Bottom Layer "Bottom Layer-5V0 4" (solid, remove dead copper, pour order 1023): 551.24,-143.62 551.24,-240.01 495.46,-295.79 495.46,-420.4 651.95,-420.4 651.95,-143.62
1V2 on Bottom Layer "Bottom Layer-1V2 3" (solid, remove dead copper, pour order 1024): -267.74,265.86 -267.74,131.95 -212.64,131.95 -177.06,96.38 -177.06,3.95 -247.59,-66.58 -247.92,-66.9 -247.92,-110.39 -164.42,-110.39 -164.42,-87.07 -101.52,-24.16 -101.52,146.42 -162.36,146.42 -162.36,265.86
VDDR3.3V on Bottom Layer "Bottom Layer-VDDR3.3V 1" (solid, remove dead copper, pour order 1025): 1521.8,-112.88 1284.89,-112.88 1284.89,-258 1336.86,-258 1336.86,-353.84 1137.07,-353.84 1137.07,-235.82 1018.28,-235.82 1018.28,-353.84 1071.94,-407.5 1389.34,-407.5 1389.34,-270.99 1446.54,-213.79 1521.8,-213.79
AGND on Bottom Layer "Bottom Layer-AGND" (solid, remove dead copper, pour order 1026): -1090.75,96.74 -1090.75,-38.61 -1124.83,-72.69 -1124.83,-125.69 -1068.35,-125.69 -1068.35,-71.23 -1039.87,-42.75 -1039.87,96.74
GND on Bottom Layer "Bottom Layer-GND" (solid, remove dead copper, pour order 1027): 1644.91,-422.1 -1332.35,-422.1 -1332.35,424 1644.91,424
GND on Mid-Layer 3 "Mid-Layer 3-GND" (solid, remove dead copper, pour order 1028): 1645.41,426.93 -1325.38,426.93 -1325.38,-418.18 1645.41,-418.18
5V0 on Top Layer "Top Layer-5V0" (solid, remove dead copper, pour order 1029): -337.95,180.36 -615.83,180.36 -615.83,21.32 -783.39,-146.24 -783.39,-200.85 -877.99,-295.45 -877.99,-408.9 -784.95,-408.9 -784.95,-311.31 -702.83,-311.31 -702.83,-180.33 -498.18,24.32 -337.95,24.32
LIMA_CATH2 on Top Layer "Top Layer-LIMA_CATH2" (solid, remove dead copper, pour order 1030): 261 vertices, not listed, extent 447.89,-256.53 761.71,80.83
VDD3.3V on Top Layer "Top Layer-VDD3.3V" (solid, remove dead copper, pour order 1031): -975.93,-132.92 -975.93,-197.19 -838.19,-197.19 -838.19,-132.92
3V3 on Top Layer "Top Layer-3V3" (solid, remove dead copper, pour order 1032): 835.12,111.62 835.12,43.45 983.94,43.45 983.94,111.62
5V0 on Top Layer "Top Layer-5V0 1" (solid, remove dead copper, pour order 1033): -273.34,12.5 -113.51,12.5 -113.51,108.5 -273.34,108.5
1V2 on Top Layer "Top Layer-1V2" (solid, remove dead copper, pour order 1034): -275.42,159.42 -128.51,159.42 -128.51,108.5 -275.42,108.5
VDDR3.3V on Top Layer "Top Layer-VDDR3.3V" (solid, remove dead copper, pour order 1035): 1309.44,-103.26 1309.44,-205.72 1465.14,-205.72 1465.14,-144.66 1363.83,-144.66 1363.83,-103.26
AGND on Top Layer "Top Layer-AGND" (solid, remove dead copper, pour order 1036): -1243.12,92.7 -1186.11,92.7 -1186.11,-84.74 -1098.46,-84.74 -1019.42,-5.7 -1019.42,141.83 -1243.12,141.83
5V0 on Top Layer "Top Layer-5V0 2" (solid, remove dead copper, pour order 1037): 482.75,-237.46 482.75,-388.13 569.54,-388.13 569.54,-237.46
GND on Top Layer "Top Layer-GND" (solid, remove dead copper, pour order 1038): -1326.74,418.51 -1326.74,-420.97 1642.04,-420.97 1642.04,418.51
AGNDR on Top Layer "Top Layer-AGNDR" (solid, remove dead copper, pour order 1039): 1078.86,120.33 1078.86,-85.35 1191.93,-85.35 1286.26,8.98 1286.26,120.33
NETJ1_1 on Top Layer "Top Layer-NETJ1_1" (solid, remove dead copper, pour order 1040): -370.11,2.99 -521.16,2.99 -699.01,-174.86 -699.01,-277.38 -612.33,-277.38 -612.33,-223.67 -544.14,-155.48 -370.11,-155.48
5V0 on Top Layer "Top Layer-5V0 3" (solid, remove dead copper, pour order 1041): 689.34,246.24 689.34,170.23 720.69,138.87 774.85,138.87 774.85,246.24
3V3 on Top Layer "Top Layer-3V3 1" (solid, remove dead copper, pour order 1042): 586.58,-280.38 586.58,-323.92 669.36,-406.7 791.68,-406.7 791.68,-304.44 696.58,-304.44 672.51,-280.38
LIMA_CATH1 on Top Layer "Top Layer-LIMA_CATH1" (solid, remove dead copper, pour order 1043): 211 vertices, not listed, extent 615.17,-253.25 1020.74,60.4
3V3 on Top Layer "Top Layer-3V3 2" (solid, remove dead copper, pour order 1044): -143.51,219.5 -271.06,219.5 -271.06,163.53 -143.51,163.53
3V3 on Top Layer "Top Layer-3V3 3" (solid, remove dead copper, pour order 1045): 400.09,-260.05 295.02,-260.05 295.02,-384.15 400.09,-384.15
LIMA_DR2 on Top Layer "Top Layer-LIMA_DR2" (solid, remove dead copper, pour order 1046): 565.73,143.68 327.76,143.68 327.76,-137.22 436.81,-137.22 436.81,83.94 565.73,83.94
LIMA_DR1 on Top Layer "Top Layer-LIMA_DR1" (solid, remove dead copper, pour order 1047): 828.59,134.91 566.42,134.91 566.42,-58.17 610.68,-58.17 610.68,64.74 828.59,64.74
VAA3.3V on Top Layer "Top Layer-VAA3.3V" (solid, remove dead copper, pour order 1048): -1187.31,54.12 -1187.31,-113.06 -1125.46,-113.06 -1125.46,54.12
3V3 on Top Layer "Top Layer-3V3 4" (solid, remove dead copper, pour order 1049): 141.24,148.8 312.16,148.8 312.16,-0.71 141.24,-0.65
1V2 on Top Layer "Top Layer-1V2 1" (solid, remove dead copper, pour order 1050): -231.74,278.13 -231.74,219.88 -148.61,219.88 -148.61,278.13
1V2_U3RX on Top Layer "Top Layer-1V2_U3RX" (solid, remove dead copper, pour order 1051): 303,-183.76 303,-26.26 216,-26.26 199.5,-9.76 121.59,-9.76 121.59,-93.36 211.98,-183.76
3V3 on Mid-Layer 4 "Mid-Layer 4-3V3" (solid, remove dead copper, pour order 1052): -1300.71,406.55 -1300.71,143.69 -802.7,143.69 -802.7,-171.69 -198.73,-171.69 -115.72,-254.7 204.54,-254.7 264.99,-315.15 372.89,-315.15 690.18,2.14 690.18,174.78 813.5,174.78 813.5,-69.72 601.53,-281.68 601.53,-358.8 829.08,-358.8 1019.59,-168.16 1019.59,406.55
VDD3.3V on Mid-Layer 4 "Mid-Layer 4-VDD3.3V" (solid, remove dead copper, pour order 1053): -1163.58,-158.78 -1163.58,-282.39 -815.84,-282.39 -815.84,125.31 -1023.58,125.31 -1023.58,-158.78
VAA3.3V on Mid-Layer 4 "Mid-Layer 4-VAA3.3V" (solid, remove dead copper, pour order 1054): -1036.12,-150.9 -1036.12,127.37 -1300.71,127.37 -1300.71,-150.9
5V0 on Mid-Layer 4 "Mid-Layer 4-5V0" (solid, remove dead copper, pour order 1055): -174.39,58.21 -350.39,58.21 -350.39,123 -300.17,123 -271.2,94.03 -174.39,94.03
5V0 on Mid-Layer 4 "Mid-Layer 4-5V0 1" (solid, remove dead copper, pour order 1056): 1043.76,403.46 1043.76,123.26 1436.25,123.26 1438.99,123.16 1441.73,122.87 1444.43,122.4 1447.1,121.73 1449.71,120.88 1452.26,119.85 1454.73,118.65 1457.11,117.27 1459.39,115.74 1461.56,114.05 1463.6,112.21 1465.51,110.23 1467.27,108.13 1468.89,105.9 1470.34,103.57 1471.63,101.15 1472.75,98.63 1473.69,96.05 1474.45,93.41 1475.02,90.72 1475.4,88 1475.59,85.26 1475.62,83.89 1475.62,-155.6 1475.52,-158.35 1475.24,-161.08 1474.76,-163.78 1474.09,-166.45 1473.24,-169.06 1472.22,-171.61 1471.01,-174.08 1469.64,-176.46 1468.1,-178.74 1466.41,-180.91 1464.57,-182.95 1462.59,-184.86 1460.49,-186.62 1458.26,-188.24 1455.93,-189.69 1453.51,-190.98 1451,-192.1 1448.41,-193.04 1445.77,-193.8 1443.09,-194.37 1440.36,-194.75 1437.62,-194.95 1436.25,-194.97 1003.19,-194.97 836.53,-361.63 597.81,-361.63 597.81,-278.89 808.04,-68.66 808.04,167.26 690.27,167.26 690.27,-10.69 378.96,-322.01 253.03,-322.01 197.5,-266.48 -116.14,-266.48 -199.94,-182.67 -805.44,-182.67 -805.44,-288.07 -1173.42,-288.07 -1173.42,-223.81 -1173.38,-223.81 -1173.38,-162.58 -1321.34,-162.58 -1321.34,-421.76 1625.34,-421.76 1625.34,403.46
VAAR3.3V on Mid-Layer 4 "Mid-Layer 4-VAAR3.3V" (solid, remove dead copper, pour order 1057): 1034.45,114.1 1034.45,-185.29 1228.61,-185.29 1228.61,114.1
VDDR3.3V on Mid-Layer 4 "Mid-Layer 4-VDDR3.3V" (solid, remove dead copper, pour order 1058): 1244.59,115.4 1244.59,-185.29 1429.39,-185.29 1432.14,-185.19 1434.87,-184.9 1437.58,-184.43 1440.24,-183.76 1442.86,-182.91 1445.4,-181.88 1447.87,-180.68 1450.25,-179.3 1452.53,-177.77 1454.7,-176.08 1456.74,-174.24 1458.65,-172.26 1460.42,-170.15 1462.03,-167.93 1463.49,-165.6 1464.78,-163.17 1465.89,-160.66 1466.83,-158.08 1467.59,-155.44 1468.16,-152.75 1468.55,-150.03 1468.74,-147.29 1468.76,-145.92 1468.76,76.03 1468.67,78.78 1468.38,81.51 1467.9,84.22 1467.24,86.89 1466.39,89.5 1465.36,92.05 1464.15,94.52 1462.78,96.9 1461.24,99.18 1459.55,101.34 1457.71,103.38 1455.73,105.29 1453.63,107.06 1451.41,108.67 1449.08,110.13 1446.65,111.42 1444.14,112.54 1441.56,113.48 1438.92,114.23 1436.23,114.81 1433.51,115.19 1430.76,115.38 1429.39,115.4
1V2 on Mid-Layer 4 "Mid-Layer 4-1V2" (solid, remove dead copper, pour order 1059): -63.64,416.9 -63.64,334.3 -119.42,278.53 -235.27,278.53 -235.27,218.46 -207.91,191.11 -207.91,157.32 -231.24,133.99 -231.24,72.58 -136.18,-22.48 -71.15,-22.48 -71.15,31.82 4.88,31.82 4.88,-57.21 135.87,-57.21 135.87,53.27 73.66,53.27 73.66,149.81 281.75,149.81 281.75,32.5 217,-32.25 217,-81.51 371.85,-81.51 371.85,46.33 438.89,113.37 439.28,113.37 575.62,251.44 575.62,416.9
GND on Mid-Layer 1 "Mid-Layer 1-GND" (solid, remove dead copper, pour order 1060): 1636.81,424.32 -1325.16,424.32 -1325.16,-423.42 1636.81,-423.42
AGND on Mid-Layer 1 "Mid-Layer 1-AGND" (solid, remove dead copper, pour order 1061): -1258.97,131.13 -1030.99,131.13 -1030.99,27.7 -1077.97,-19.28 -1077.97,-93.93 -1258.97,-93.93
AGNDR on Mid-Layer 1 "Mid-Layer 1-AGNDR" (solid, remove dead copper, pour order 1062): 1280.68,95.53 1280.68,32.74 1195.08,-52.85 1195.08,-134.86 1027.99,-134.86 1027.99,49.91 1073.61,95.53

## Other copper
Top Layer:
  region net GND: -702.85,-327.57 -702.85,-394.33 -138.78,-394.33 -138.78,-326.86 -396.6,-326.86 -396.6,-272.22 -433,-272.22 -433,-327.57 -702.85,-327.57
  region net LIMA_DR2: 358.4,109.7 433.28,109.7 433.28,30.59 433.11,30.42 433.11,-88.77 358.4,-88.77 358.4,109.7
  region net GND: 705.42,-152.63 705.42,-288.09 808.94,-288.09 823.62,-302.77 823.62,-315.99 871.34,-315.99 871.34,-264.59 857.76,-264.59 842.16,-248.99 842.16,-152.63 705.42,-152.63
  region net GND: 383.16,-146.36 451.14,-146.36 451.14,-172.4 475.42,-196.68 475.42,-399.48 415.54,-399.48 415.54,-194.09 383.16,-194.09 383.16,-146.36
  region net LIMA_CATH1: 808.52,55.39 642.6,55.39 642.6,-55.35 808.52,-55.35 808.52,55.39
  region net 5V0: -582.11,174.19 -582.11,112.16 -354.68,112.16 -354.68,174.19 -582.11,174.19
  region net LIMA_CATH2: 478.41,77.5 451.02,50.11 451.02,-26.55 450.8,-26.76 450.8,-109.81 552.4,-109.81 552.4,77.16 478.41,77.5
  region net VAA3.3V: -1182.77,45.15 -1182.77,-112.16 -1145.02,-112.16 -1145.02,45.15 -1182.77,45.15
Mid-Layer 1:
  region: -1114.27,58.5 -1114.27,-53.33 -1010.79,-53.33 -1010.79,58.5 -1114.27,58.5
  region: 1189.4,57.81 1189.4,-90.29 1285.08,-90.29 1285.08,57.81 1189.4,57.81
Bottom Layer:
  region net GND: -1229.16,-214.82 -1229.16,-352.14 -1194.22,-352.14 -1194.22,-214.82 -1229.16,-214.82
  region net 1V2: -187.21,142.2 -245.51,142.2 -245.51,164.24 -187.21,164.24 -187.21,142.2
  region net GND: 1630.4,-169.24 1557.68,-169.24 1557.68,-212.37 1489.63,-212.37 1435.68,-266.32 1394.35,-266.32 1394.35,-351.91 1457.74,-351.91 1457.74,-286.66 1494.89,-249.52 1582.61,-249.52 1582.61,-229.06 1630.4,-229.06 1630.4,-169.24
  region net GND: 821.97,306.78 821.97,121.12 887.58,121.12 887.58,306.78 821.97,306.78

## Silkscreen, mask and mechanical layers (free items; w line width, h text height)
Top Overlay:
  lines w8.66: 1077.85,-411.86 1314.31,-411.86 ; 1080.49,-407.46 1306.16,-407.46 ; 1083.14,-403.05 1202.36,-403.05 ; 1085.78,-398.64 1197.73,-398.64 ; 1088.2,-394.23 1166.22,-394.23 ; 1090.63,-389.83 1161.81,-389.83 ; 1093.05,-385.42 1157.4,-385.42 ; 1095.7,-381.01 1152.77,-381.01 ; 1098.34,-376.6 1152.33,-376.6 ; 1100.99,-372.2 1151.89,-372.2 ; 1103.19,-367.79 1151.23,-367.79 ; 1106.05,-363.38 1150.79,-363.38 ; 1108.48,-358.97 1150.35,-358.97 ; 1110.68,-354.56 1149.91,-354.56 ; 1113.33,-350.16 1149.25,-350.16 ; 1115.75,-345.75 1148.59,-345.75 ; 1118.62,-341.34 1147.93,-341.34 ; 1121.04,-336.93 1147.49,-336.93 ; 1123.46,-332.53 1149.91,-332.53 ; 1126.11,-328.12 1151.89,-328.12 ; 1128.75,-323.71 1147.93,-323.71 ; 1131.4,-319.3 1139.99,-319.3 ; 1138.45,-306.08 1165.78,-306.08 ; 1141.09,-301.67 1169.3,-301.67 ; 1143.52,-297.27 1172.17,-297.27 ; 1144.18,-310.49 1162.69,-310.49 ; 1146.16,-292.86 1175.25,-292.86 ; 1148.59,-288.45 1179.66,-288.45 ; 1151.23,-284.04 1184.51,-284.04 ; 1152.55,-314.9 1159.83,-314.9 ; 1153.22,-326.14 1147.71,-337.15 1153.22,-381.23 1169.74,-397.76 1175.25,-397.76 ccw(c1172.34,-389.49) 1175.25,-381.23 1169.74,-342.66 1175.03,-338.04 ; 1153.88,-279.64 1198.83,-279.64 ; 1156.08,-275.23 1222.86,-275.23 ; 1158.06,-317.54 1175.25,-293.08 1186.27,-282.06 1246.88,-271.04 ; 1158.73,-270.82 1246.88,-270.82 ; 1161.15,-266.41 1244.45,-266.41 ; 1163.79,-262.01 1242.03,-262.01 ; 1166,-257.6 1239.38,-257.6 ; 1168.64,-253.19 1236.74,-253.19 ; 1171.29,-248.78 1234.54,-248.78 ; 1173.93,-244.38 1231.67,-244.38 ; 1174.59,-376.6 1176.8,-376.6 ; 1175.25,-381.01 1185.39,-381.01 ; 1175.25,-375.72 1197.29,-386.74 ; 1176.36,-239.97 1229.47,-239.97 ; 1178.78,-235.56 1226.6,-235.56 ; 1179.66,-394.23 1195.97,-394.23 ; 1180.1,-385.42 1194.87,-385.42 ; 1180.98,-389.83 1195.75,-389.83 ; 1181.42,-231.15 1224.18,-231.15 ; 1182.53,-330.76 1197.29,-326.14 1219.33,-348.17 ; 1183.85,-226.74 1221.97,-226.74 ; 1186.49,-222.34 1218.89,-222.34 ; 1188.92,-217.93 1216.46,-217.93 ; 1190.02,-346.41 1190.02,-362.94 1206.55,-373.96 ; 1191.56,-213.52 1214.04,-213.52 ; 1193.99,-209.11 1211.18,-209.11 ; 1196.63,-204.71 1208.97,-204.71 ; 1199.27,-200.3 1206.77,-200.3 ; 1201.7,-195.89 1204.12,-195.89 ; 1202.58,-403.05 1297.78,-403.05 ; 1207.43,-398.64 1289.85,-398.64 ; 1211.84,-394.23 1281.04,-394.23 ; 1213.82,-392.25 1224.84,-392.25 ccw(c1219.57,-390.35) 1221.75,-385.2 ; 1214.04,-358.97 1213.82,-358.97 1202.8,-381.23 ccw(c1208.39,-392.25) 1202.8,-403.27 1235.86,-370.21 ; 1219.11,-349.94 1219.11,-348.17 ; 1222.86,-385.42 1264.07,-385.42 ; 1224.84,-381.23 1235.86,-381.23 ccw(c1229.85,-380.94) 1231.89,-375.28 ; 1225.5,-389.83 1273.1,-389.83 ; 1233.87,-376.6 1247.54,-376.6 ; 1233.87,-372.2 1239.6,-372.2 ; 1236.08,-381.01 1256.35,-381.01 ; 1243.13,-363.16 1246.88,-359.19 1257.9,-326.14 1271.12,-313.35 ; 1244.45,-363.38 1300.21,-363.38 ; 1246.88,-358.97 1297.34,-358.97 ; 1248.42,-354.56 1295.14,-354.56 ; 1249.96,-350.16 1292.5,-350.16 ; 1251.5,-345.75 1289.85,-345.75 ; 1252.61,-367.79 1302.63,-367.79 ; 1253.05,-341.34 1287.43,-341.34 ; 1254.37,-336.93 1285,-336.93 ; 1256.13,-332.53 1282.14,-332.53 ; 1257.46,-328.12 1279.49,-328.12 ; 1260.76,-372.2 1305.06,-372.2 ; 1260.76,-323.71 1277.07,-323.71 ; 1265.17,-319.3 1274.87,-319.3 ; 1269.36,-376.6 1307.92,-376.6 ; 1269.58,-314.9 1272.22,-314.9 ; 1277.29,-381.01 1310.57,-381.01 ; 1285.44,-385.42 1312.55,-385.42 ; 1293.6,-389.83 1314.97,-389.83 ; 1302.19,-394.23 1317.62,-394.23 ; 1310.35,-398.64 1320.26,-398.64 ; 1318.94,-403.05 1323.13,-403.05 ; 1076.3,-414.51 1319.82,-414.51 1133.16,-315.78 1076.3,-414.51 ; 1137.79,-307.18 1202.8,-193.69 1324.89,-406.35 1137.79,-307.18
  lines w9.84: -874.46,-208.4 -848.89,-182.82 -825.28,-206.43 -825.28,-208.4 -874.46,-208.4 ; 119.48,-98.19 145.06,-72.61 168.66,-96.22 168.66,-98.19 119.48,-98.19 ; 1409.08,-205.26 1434.66,-179.68 1458.26,-203.29 1458.26,-205.26 1409.08,-205.26
  text "0V0" at -983.37,277.96 h100
  text "XPIRL" at -1300.93,276.43 h110.24
  text "UART" at -458.65,210.61 h47.24
Bottom Overlay:
  text "REST" at 393.81,-68.77 h43.31 r270
  text "XPIRL" at 995.43,-391.95 h110.24
  text "0V0" at 696.75,-393.28 h78.74
Drill Drawing:
  lines w1: -1338.58,433.07 -1338.56,433.07 ; 1299.21,0 1299.24,0 ; 1299.21,0 1299.24,0 ; 1299.21,0 1299.24,0 ; 1299.21,0 1299.24,0 ; 1653.54,-433.07 1653.57,-433.07 ; 1653.54,-433.07 1653.57,-433.07 ; 1653.54,433.07 1653.57,433.07 ; 1653.54,433.07 1653.57,433.07 ; 1653.54,433.07 1653.57,433.07 ; -984.25,0 -984.23,0 ; 472.44,0 472.47,0 ; 631.5,0 631.52,0 ; 631.89,0 631.92,0
  lines w3.94: -1338.58,-393.7 ccw(c-1299.21,-393.7) -1299.21,-433.07 -1181.1,-433.07 -1181.1,-374.02 -1102.36,-374.02 -1102.36,-433.07 1417.32,-433.07 1417.32,-374.02 1496.06,-374.02 1496.06,-433.07 1614.17,-433.07 ccw(c1614.17,-393.7) 1653.54,-393.7 1653.54,393.7 ccw(c1614.17,393.7) 1614.17,433.07 1496.06,433.07 1496.06,374.02 1417.32,374.02 1417.32,433.07 -1102.36,433.07 -1102.36,374.02 -1181.1,374.02 -1181.1,433.07 -1299.21,433.07 ccw(c-1299.21,393.7) -1338.58,393.7 -1338.58,-393.7
  lines w10: -1338.58,483.07 -1338.58,779.43 ; -984.25,50 -984.25,674.9 ; -29.34,624.9 -984.25,624.9 ; -27.07,729.43 -1338.58,729.43 ; 322.44,519.11 472.44,519.11 ; 342.03,729.43 1653.54,729.43 ; 344.3,624.9 1299.21,624.9 ; 472.44,50 472.44,569.11 ; 631.5,50 631.5,568.58 ; 631.89,50 631.89,569.11 ; 781.89,519.11 631.89,519.11 ; 789.9,518.58 631.5,518.58 ; 1140.81,518.58 1299.21,518.58 ; 1299.21,568.3 1299.21,50 ; 1299.21,568.58 1299.21,50 ; 1299.21,674.9 1299.21,50 ; 1349.21,0 1836.82,0 ; 1653.54,568.3 1653.54,483.07 1653.54,779.43 ; 1703.54,433.07 1936.61,433.07 ; 1786.82,-583.07 1786.82,-433.07 ; 1786.82,150 1786.82,0 ; 1836.82,-433.07 1703.54,-433.07 1936.61,-433.07 ; 1886.61,-95.98 1886.61,-433.07 ; 1886.61,39.02 1886.61,433.07 ; -1338.58,729.43 -1238.58,754.43 -1238.58,704.43 -1338.58,729.43 ; -984.25,624.9 -884.25,649.9 -884.25,599.9 -984.25,624.9 ; 472.44,519.11 372.44,494.11 372.44,544.11 472.44,519.11 ; 631.5,518.58 731.5,543.58 731.5,493.58 631.5,518.58 ; 631.89,519.11 731.89,544.11 731.89,494.11 631.89,519.11 ; 1299.21,518.3 1653.54,518.3 ; 1299.21,518.3 1399.21,543.3 1399.21,493.3 1299.21,518.3 ; 1299.21,518.58 1199.21,493.58 1199.21,543.58 1299.21,518.58 ; 1299.21,624.9 1199.21,599.9 1199.21,649.9 1299.21,624.9 ; 1653.54,518.3 1553.54,493.3 1553.54,543.3 1653.54,518.3 ; 1653.54,729.43 1553.54,704.43 1553.54,754.43 1653.54,729.43 ; 1786.82,-433.07 1811.82,-533.07 1761.82,-533.07 1786.82,-433.07 ; 1786.82,0 1761.82,100 1811.82,100 1786.82,0 ; 1886.61,-433.07 1861.61,-333.07 1911.61,-333.07 1886.61,-433.07 ; 1886.61,433.07 1911.61,333.07 1861.61,333.07 1886.61,433.07
  text "76.0mm" at 2.93,691.93 h50
  text "58.0mm" at 0.66,587.4 h50
  text "9.0mm" at 1371.74,579.43 h50
  text "4.0mm" at 47.43,486.67 h50
  text "17.0mm" at 819.9,481.08 h50
  text "22.0mm" at 1863.11,-65.98 h50
  text "11.0mm" at 1681.24,-250.4 h50